# EAGLE board erfid-squink (EAGLE 7.3.0)
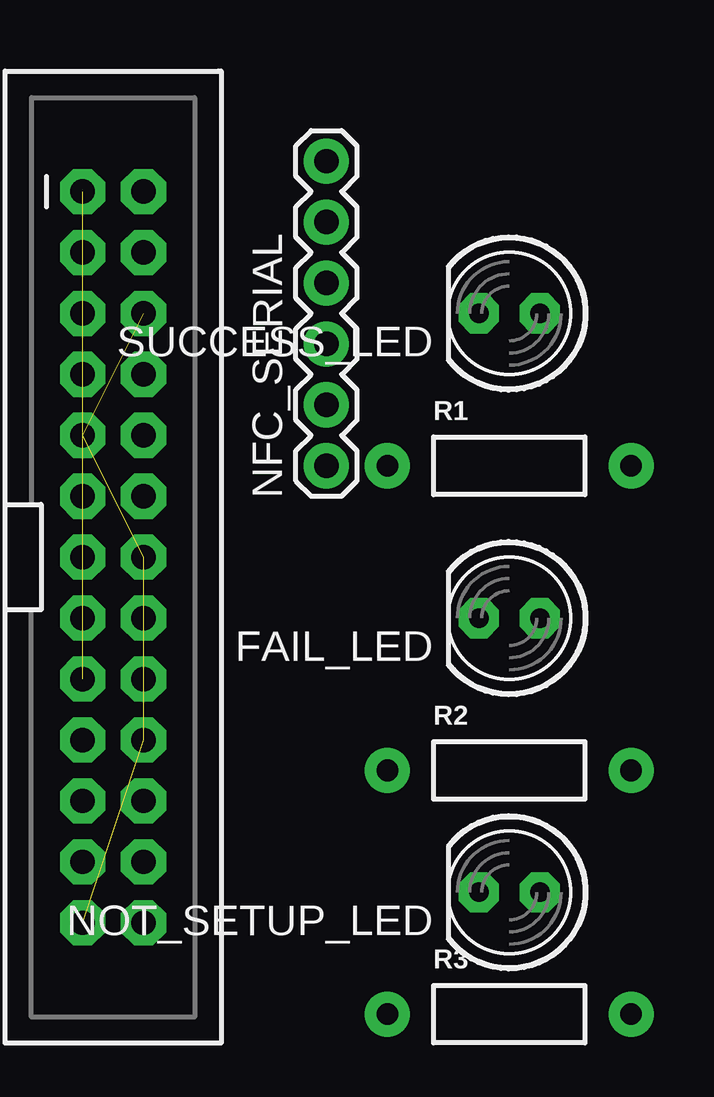
[diagram p0: board, top side]
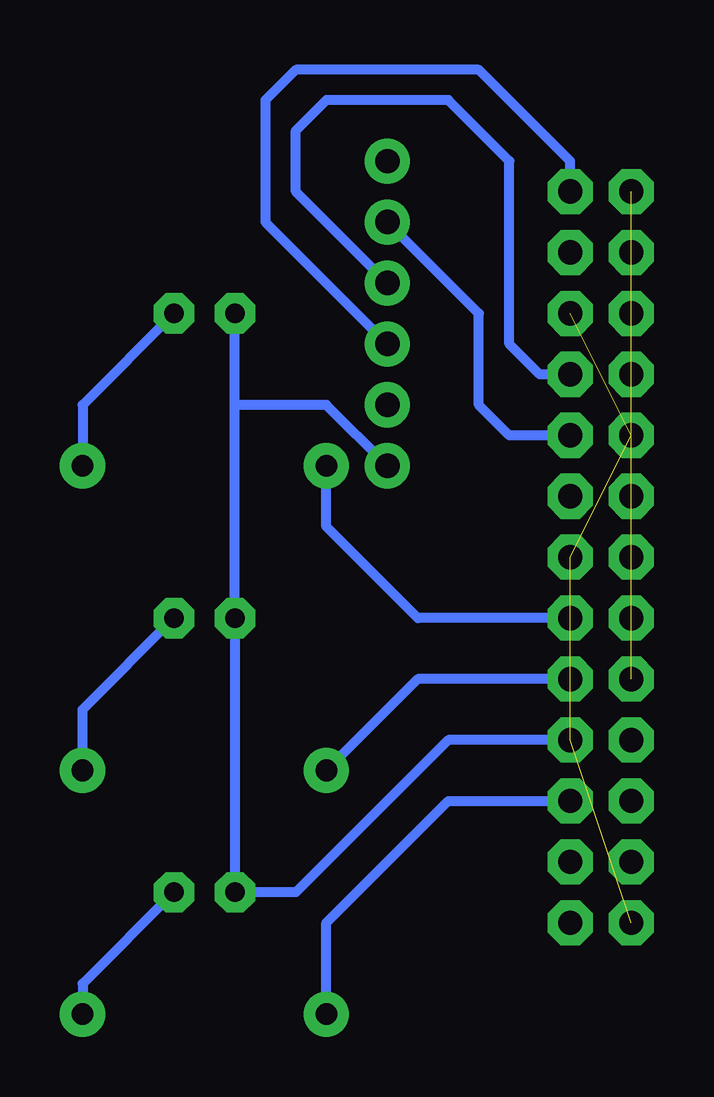
[diagram p1: board, bottom side, seen from below]

No outline drawn. Coordinates in mm, seen from the top.
Copper layers (1*16): Top 0.035mm / dielectric 1.5mm / Bottom 0.035mm
Design rules "default": minimum track width 10mil, minimum drill 24mil, track to track 8mil, track to pad 8mil, pad to pad 8mil, via to via 8mil, smd to smd 8mil, copper to edge 40mil, drill to drill 8mil, minimum pad ring 10mil, minimum via ring 8mil, stop-mask expansion 4mil, vias tented up to drill 0mil, thermal gap 10mil

## Footprints (pad centres in the part's own frame; a part is rotated, then mirrored left to right if it is on the bottom)
LED5MM = drill 0.813 pad 1.676 octagon: A -1.27,0; K 1.27,0
2X13-SHROUDED = drill 1.016 pad 1.88 octagon: 1 -1.27,15.24; 2 1.27,15.24; 3 -1.27,12.7; 4 1.27,12.7; 5 -1.27,10.16; 6 1.27,10.16; 7 -1.27,7.62; 8 1.27,7.62; 9 -1.27,5.08; 10 1.27,5.08; 11 -1.27,2.54; 12 1.27,2.54; 13 -1.27,0; 14 1.27,0; 15 -1.27,-2.54; 16 1.27,-2.54; 17 -1.27,-5.08; 18 1.27,-5.08; 19 -1.27,-7.62; 20 1.27,-7.62; 21 -1.27,-10.16; 22 1.27,-10.16; 23 -1.27,-12.7; 24 1.27,-12.7; 25 -1.27,-15.24; 26 1.27,-15.24
1X06 = drill 1.016 pad 1.88: 1 0,0; 2 2.54,0; 3 5.08,0; 4 7.62,0; 5 10.16,0; 6 12.7,0
AXIAL-0.4 = drill 0.9 pad 1.88: P$1 -5.08,0; P$2 5.08,0

## Placement (x,y rotation side)
FAIL_LED  [LED5MM]  30.48,17.78 180 top
JP1  RASPBERRYPI-GPIOPTH  [2X13-SHROUDED]  13.97,20.32 0 top
NFC_SERIAL  [1X06]  22.86,24.13 90 top
NOT_SETUP_LED  [LED5MM]  30.48,6.35 180 top
R1  [AXIAL-0.4]  30.48,24.13 0 top
R2  [AXIAL-0.4]  30.48,11.43 0 top
R3  [AXIAL-0.4]  30.48,1.27 0 top
SUCCESS_LED  [LED5MM]  30.48,30.48 180 top

## Library data of the parts
FAIL_LED NOT_SETUP_LED SUCCESS_LED = adafruit
JP1 = SparkFun-Boards; DIST: sparkfun; DIST_ID: PRT-11490
NFC_SERIAL = SparkFun-Connectors; PROD_ID: CONN-08437
R1-R3 = SparkFun-Resistors

## Nets
3.3V: JP1.1 JP1.17
5V: JP1.4
FAIL_LED_LINE: JP1.18 R2.P$1
GND: FAIL_LED.K JP1.6 JP1.9 JP1.14 JP1.20 JP1.25 NFC_SERIAL.1 NOT_SETUP_LED.K SUCCESS_LED.K
N$1: FAIL_LED.A R2.P$2
N$2: R1.P$2 SUCCESS_LED.A
N$3: NOT_SETUP_LED.A R3.P$2
NOT_SETUP_LINE: JP1.22 R3.P$1
RXD: JP1.10 NFC_SERIAL.5
SUCCESS_LED_LINE: JP1.16 R1.P$1
TXD: JP1.8 NFC_SERIAL.4
VCC: JP1.2 NFC_SERIAL.3

## Tracks (layer width: path | path; a pad name or v marks a point on that pad's centre or on a via)
3.3V  (1 unrouted)
FAIL_LED_LINE
  Bottom 0.406: JP1.18 21.59,15.24 R2.P$1
GND  (4 unrouted)
  Bottom 0.406: 29.21,26.67 FAIL_LED.K NOT_SETUP_LED.K 26.67,6.35 20.32,12.7 JP1.20 | 29.21,26.67 SUCCESS_LED.K | NFC_SERIAL.1 25.4,26.67 29.21,26.67
N$1
  Bottom 0.406: R2.P$2 35.56,13.97 FAIL_LED.A
N$2
  Bottom 0.406: SUCCESS_LED.A 35.56,26.67 R1.P$2
N$3
  Bottom 0.406: NOT_SETUP_LED.A 35.56,2.54 R3.P$2
NOT_SETUP_LINE
  Bottom 0.406: R3.P$1 25.4,5.08 20.32,10.16 JP1.22
RXD
  Bottom 0.406: JP1.10 17.78,25.4 19.05,26.67 19.05,30.48 NFC_SERIAL.5
SUCCESS_LED_LINE
  Bottom 0.406: JP1.16 21.59,17.78 25.4,21.59 R1.P$1
TXD
  Bottom 0.406: JP1.8 16.51,27.94 17.78,29.21 17.78,36.83 20.32,39.37 25.4,39.37 26.67,38.1 26.67,35.56 NFC_SERIAL.4
VCC
  Bottom 0.406: JP1.2 15.24,36.83 19.05,40.64 26.67,40.64 27.94,39.37 27.94,34.29 NFC_SERIAL.3